# EAGLE board rc2usb_3 (EAGLE 6.3)
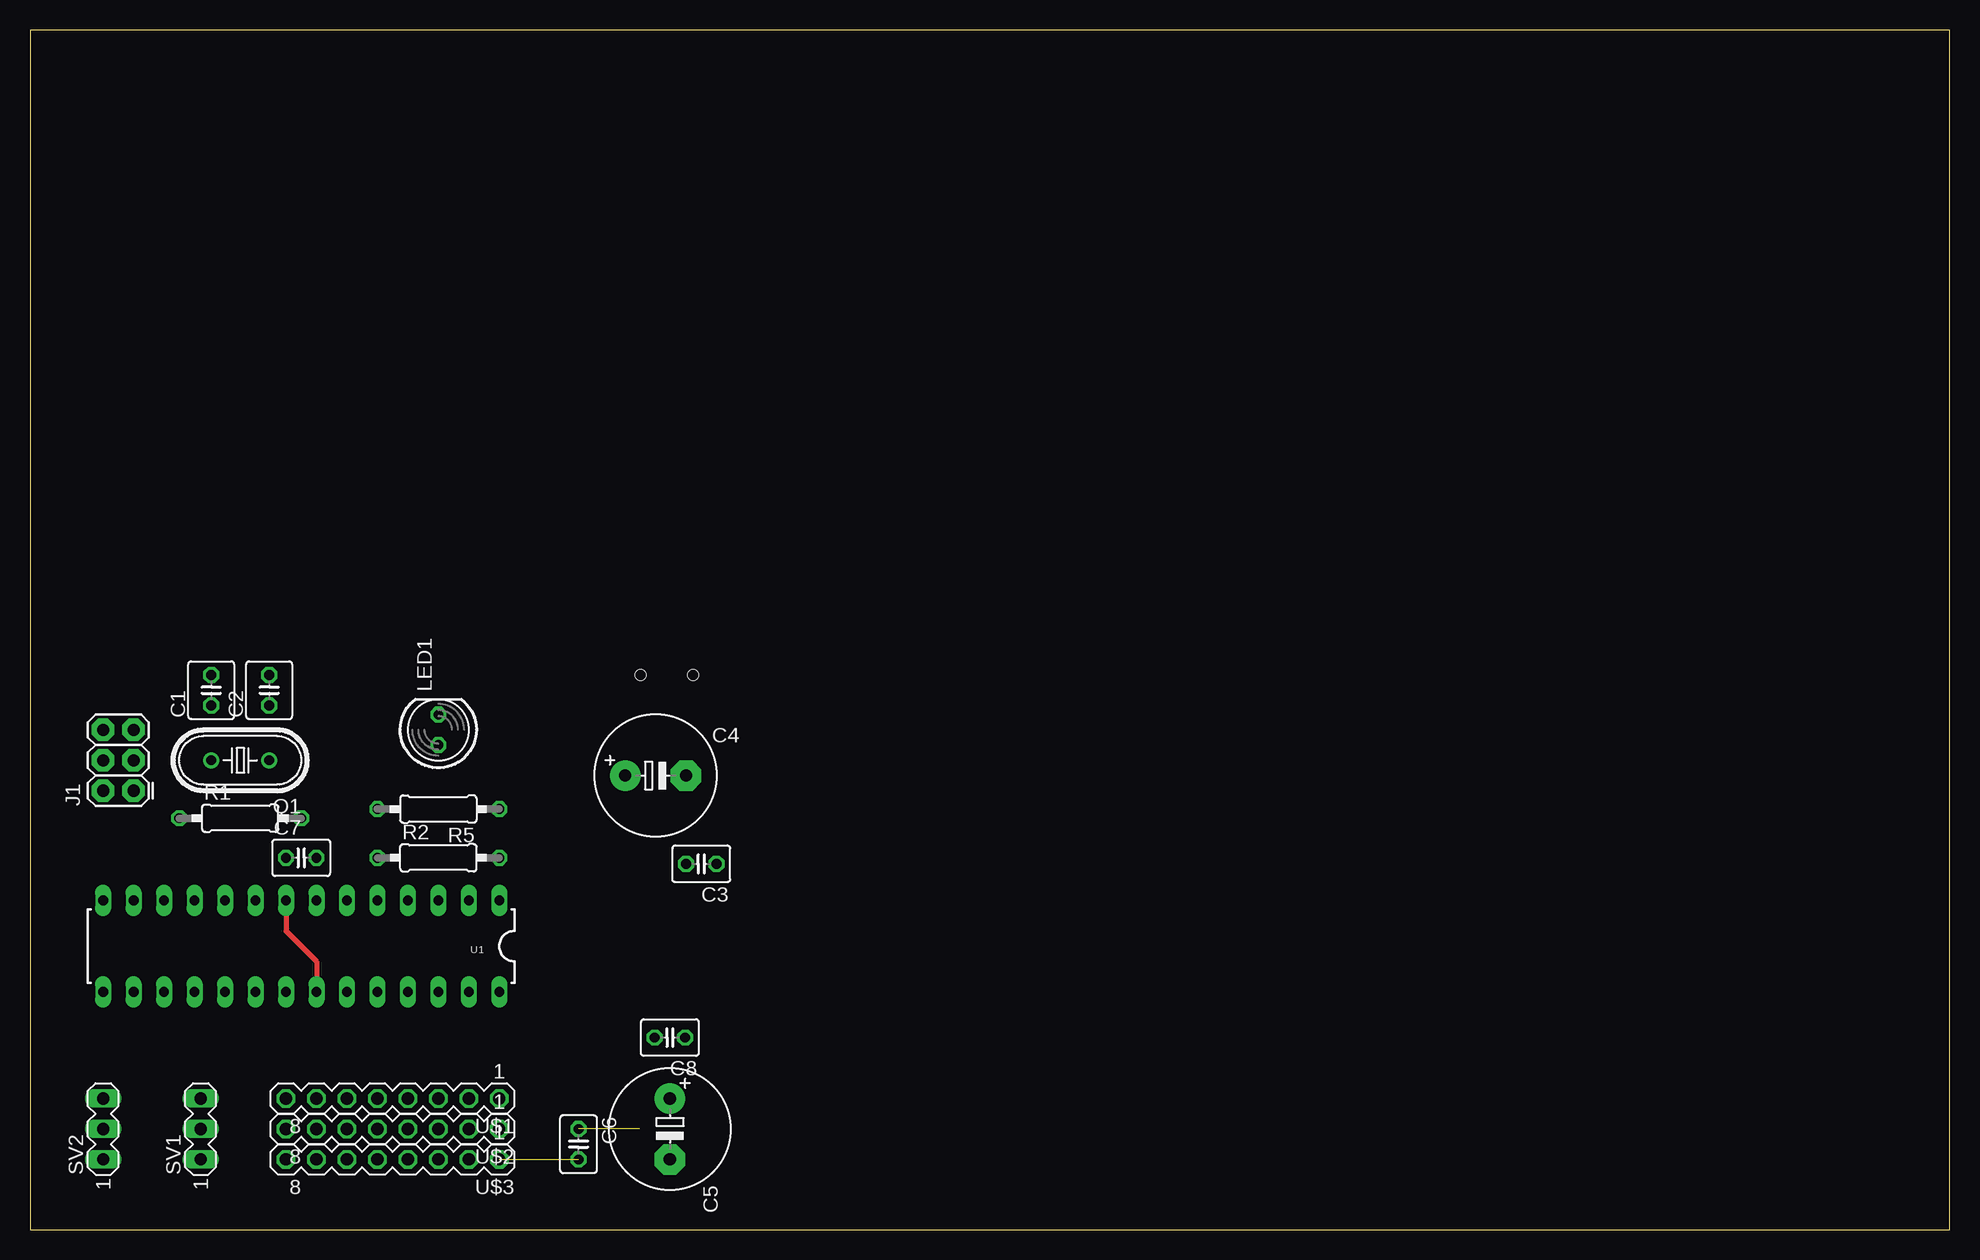
[diagram p0: board, top side]
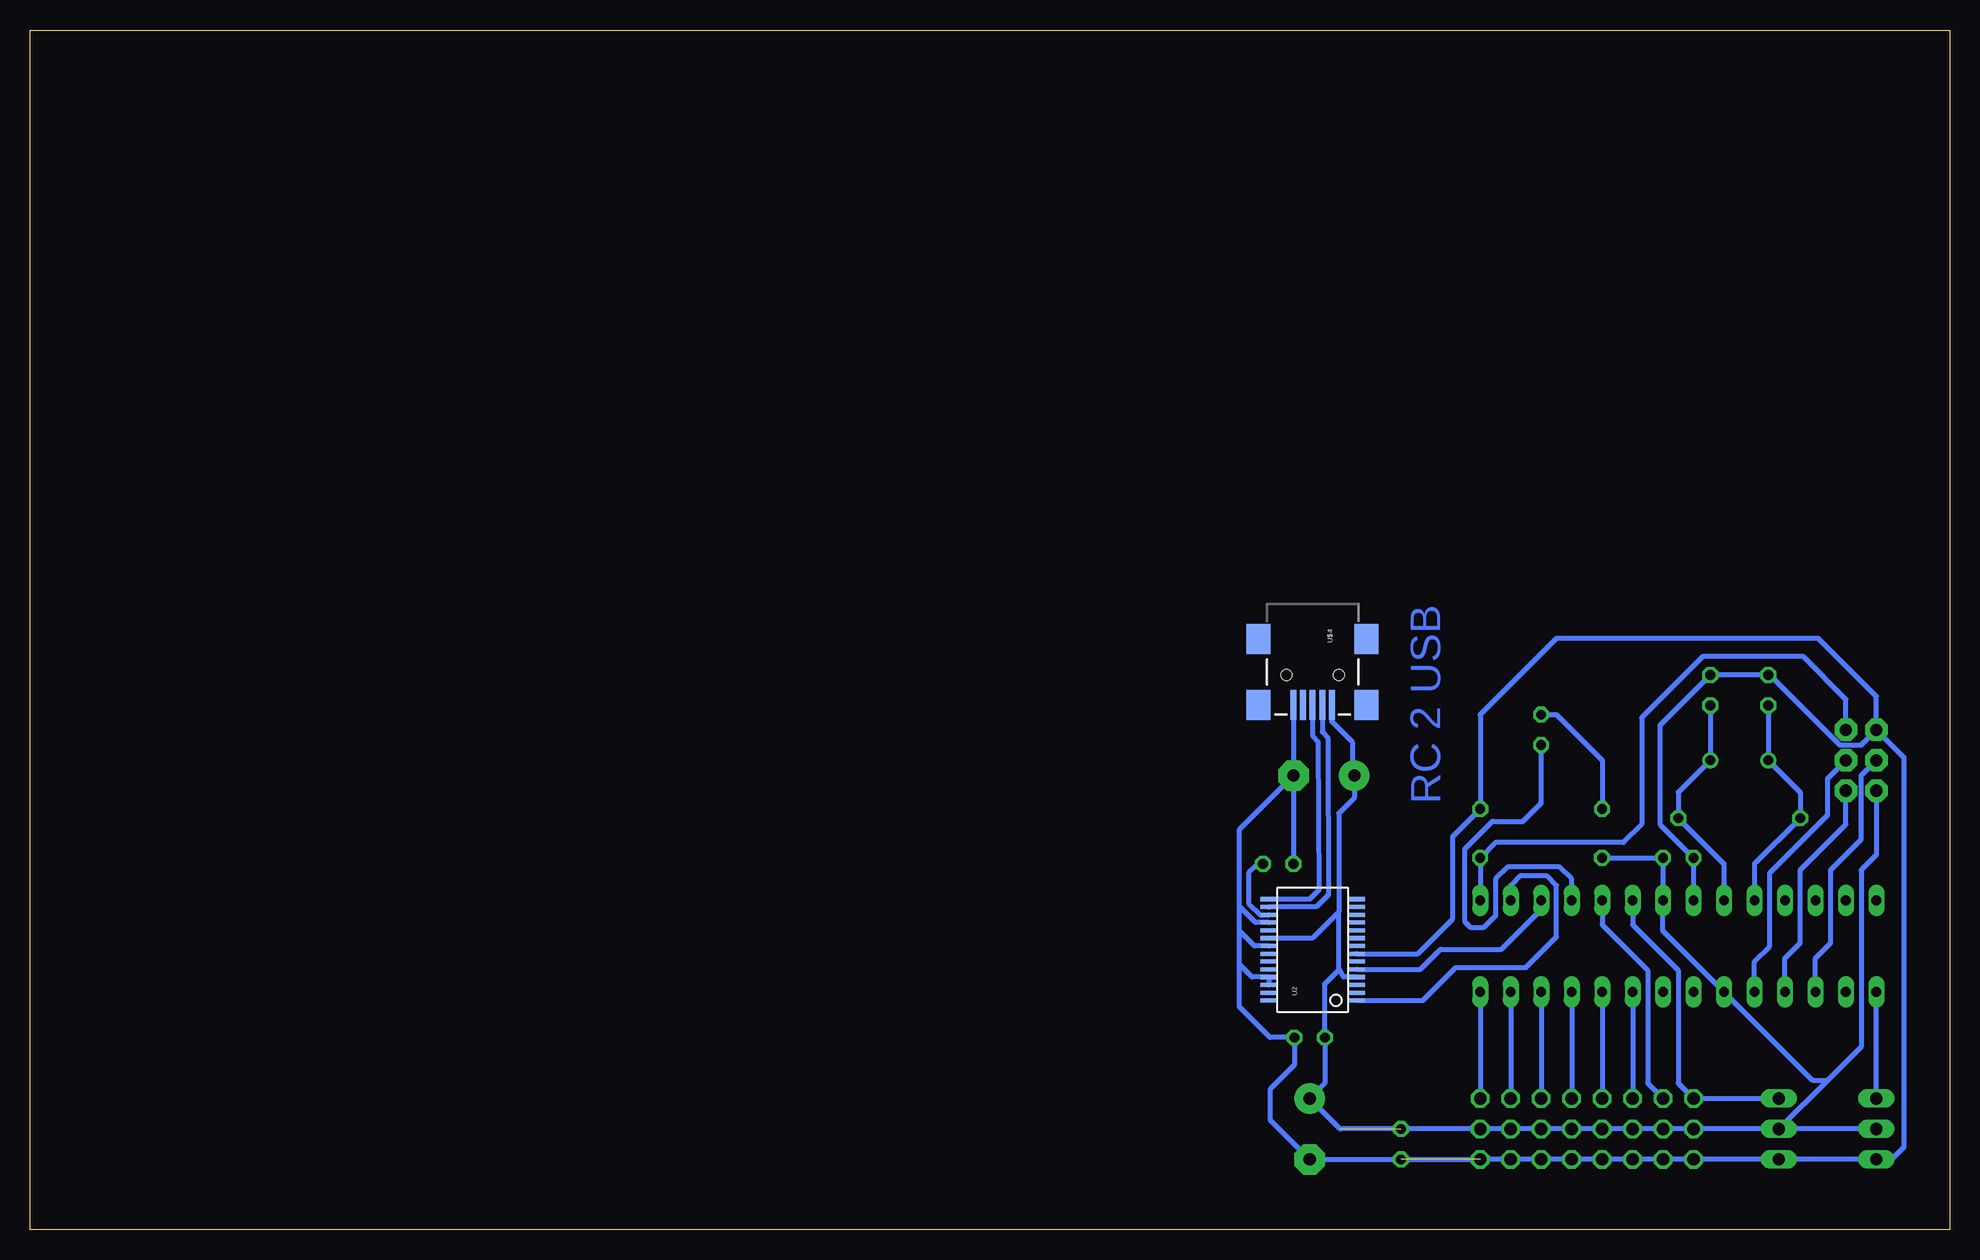
[diagram p1: board, bottom side, seen from below]

Size 160 x 100 mm. Coordinates in mm from the lower left corner, seen from the top.
Outline: 0,0 160,0 160,100 0,100 0,0
Copper layers (1*16): Top 0.035mm / dielectric 1.5mm / Bottom 0.035mm
Design rules "default": minimum track width 10mil, minimum drill 24mil, track to track 8mil, track to pad 8mil, pad to pad 8mil, via to via 8mil, smd to smd 8mil, copper to edge 40mil, drill to drill 8mil, minimum pad ring 10mil, minimum via ring 8mil, stop-mask expansion 4mil, vias tented up to drill 0mil, thermal gap 10mil

## Footprints (pad centres in the part's own frame; a part is rotated, then mirrored left to right if it is on the bottom)
C025-040X050 = drill 0.813 octagon: 1 -1.27,0; 2 1.27,0
C025-030X050 = drill 0.813 octagon: 1 -1.27,0; 2 1.27,0
E5-10,5 = drill 1.016 pad 2.54: + -2.54,0 | drill 1.016 pad 2.54 octagon: - 2.54,0
2X3 = drill 1.016 pad 1.88 octagon: 1 0,0; 2 0,2.54; 3 2.54,0; 4 2.54,2.54; 5 5.08,0; 6 5.08,2.54
LED5MM = drill 0.813 octagon: A -1.27,0; K 1.27,0
HC49U70 = drill 0.813: 1 -2.413,0; 2 2.413,0
0207/10 = drill 0.813 octagon: 1 -5.08,0; 2 5.08,0
MA03-1 = drill 1.016 long: 1 -2.54,0; 2 0,0; 3 2.54,0
DIL28-3 = drill 0.813 long: 1 -16.51,-3.81; 2 -13.97,-3.81; 3 -11.43,-3.81; 4 -8.89,-3.81; 5 -6.35,-3.81; 6 -3.81,-3.81; 7 -1.27,-3.81; 8 1.27,-3.81; 9 3.81,-3.81; 10 6.35,-3.81; 11 8.89,-3.81; 12 11.43,-3.81; 13 13.97,-3.81; 14 16.51,-3.81; 15 16.51,3.81; 16 13.97,3.81; 17 11.43,3.81; 18 8.89,3.81; 19 6.35,3.81; 20 3.81,3.81; 21 1.27,3.81; 22 -1.27,3.81; 23 -3.81,3.81; 24 -6.35,3.81; 25 -8.89,3.81; 26 -11.43,3.81; 27 -13.97,3.81; 28 -16.51,3.81
SSOP28DB = smd 0.348 x 1.397: 1 -4.225,-3.656; 2 -3.575,-3.656; 3 -2.925,-3.656; 4 -2.275,-3.656; 5 -1.625,-3.656; 6 -0.975,-3.656; 7 -0.325,-3.656; 8 0.325,-3.656; 9 0.975,-3.656; 10 1.625,-3.656; 11 2.275,-3.656; 12 2.925,-3.656; 13 3.575,-3.656; 14 4.225,-3.656; 15 4.225,3.656; 16 3.575,3.656; 17 2.925,3.656; 18 2.275,3.656; 19 1.625,3.656; 20 0.975,3.656; 21 0.325,3.656; 22 -0.325,3.656; 23 -0.975,3.656; 24 -1.625,3.656; 25 -2.275,3.656; 26 -2.925,3.656; 27 -3.575,3.656; 28 -4.225,3.656
HEADER_8_WAY = drill 1.016 octagon: 1 -8.89,0; 2 -6.35,0; 3 -3.81,0; 4 -1.27,0; 5 1.27,0; 6 3.81,0; 7 6.35,0; 8 8.89,0
USB-MINIB = smd 2.5 x 0.5: D+ 2.5,0; D- 2.5,0.8; GND 2.5,-1.6; ID 2.5,-0.8; VBUS 2.5,1.6 | smd 2.5 x 2: MTN1 -3,4.5; MTN2 2.5,4.5; MTN3 -3,-4.5; MTN4 2.5,-4.5 | hole 0.9: 0,2.2; 0,-2.2

## Placement (x,y rotation side)
C1  22p  [C025-040X050]  15.11,44.96 90 top
C2  22p  [C025-040X050]  19.94,44.96 90 top
C3  100nF  [C025-030X050]  55.96,30.48 180 top
C4  1000uF  [E5-10,5]  52.15,37.85 0 top
C5  1000uF  [E5-10,5]  53.34,8.38 270 top
C6  100nF  [C025-030X050]  45.72,7.11 270 top
C7  100nF  [C025-030X050]  22.61,30.99 0 top
C8  100nF  [C025-030X050]  53.34,16 180 top
J1  AVR_SPI_PRG_6PTH  [2X3]  8.64,36.58 90 top
LED1  [LED5MM]  34.04,41.66 90 top
Q1  16MHz  [HC49U70]  17.53,39.12 180 top
R1  1M  [0207/10]  17.53,34.29 0 top
R2  [0207/10]  34.04,30.99 0 top
R5  680  [0207/10]  34.04,35.05 180 top
SV1  [MA03-1]  14.22,8.38 90 top
SV2  [MA03-1]  6.1,8.38 90 top
U1  ATMEGA328P_PDIP  [DIL28-3]  22.61,23.62 180 top
U2  FT232RL-BASICSSOP  [SSOP28DB]  53.09,23.32 90 bottom
U$1  HEADER_8_WAY  [HEADER_8_WAY]  30.23,10.92 180 top
U$2  HEADER_8_WAY  [HEADER_8_WAY]  30.23,8.38 180 top
U$3  HEADER_8_WAY  [HEADER_8_WAY]  30.23,5.84 180 top
U$4  USB-MINIB-5PIN  [USB-MINIB]  53.09,46.23 270 bottom

## Library data of the parts
C1 C2 R1 R2 R5 = resistor
C3-C8 = rcl
J1 U$4 = SparkFun-Connectors
LED1 = led
Q1 = crystal; OC_FARNELL: unknown; OC_NEWARK: unknown
SV1 SV2 = con-lstb; OC_FARNELL: unknown; OC_NEWARK: unknown
U1 U2 = SparkFun-DigitalIC
U$1-U$3 = rc2usb

## Nets
+5V: C4.+ C5.+ C6.1 C7.2 C8.2 J1.2 R2.1 SV1.2 SV2.2 U1.7 U1.20 U2.4 U2.20 U$2.1 U$2.2 U$2.3 U$2.4 U$2.5 U$2.6 U$2.7 U$2.8 U$4.VBUS
GND: C1.2 C2.2 C3.2 C4.- C5.- C6.2 C7.1 C8.1 J1.6 R5.1 SV1.1 SV2.1 U1.8 U1.22 U2.7 U2.18 U2.21 U2.25 U2.26 U$3.1 U$3.2 U$3.3 U$3.4 U$3.5 U$3.6 U$3.7 U$3.8 U$4.GND
N$1: C2.1 Q1.1 R1.2 U1.9
N$2: C1.1 Q1.2 R1.1 U1.10
N$3: J1.4 U1.17
N$4: J1.1 U1.18
N$5: J1.3 U1.19
N$6: U2.15 U$4.D+
N$7: U2.16 U$4.D-
N$8: U1.24 U$1.5
N$9: C3.1 U2.17
N$10: LED1.A U1.4
N$14: U1.25 U$1.4
N$15: U1.26 U$1.3
N$16: U1.23 U$1.6
N$17: U1.27 U$1.2
N$18: U1.28 U$1.1
N$19: U1.5 U$1.7
N$20: SV1.3 U1.6 U$1.8
N$22: SV2.3 U1.15
N$23: LED1.K R5.2
RESET: J1.5 R2.2 U1.1
RXD: U1.2 U2.1
TXD: U1.3 U2.5

## Tracks (layer width: path | path; a pad name or v marks a point on that pad's centre or on a via)
+5V  (1 unrouted)
  Bottom 0.406: SV2.2 SV1.2 | SV1.2 U$2.8 U$2.7 U$2.6 U$2.5 U$2.4 U$2.3 U$2.2 U$2.1 50.8,8.38 C5.+ 52.07,12.19 C8.2 52.07,20.49 50.87,21.69 | J1.2 6.1,31.24 7.37,29.97 7.37,15.24 10.16,12.45 | 10.16,12.45 SV1.2 | 10.16,12.45 11.43,12.45 U1.20 23.88,24.89 U1.7 C7.2 R2.1 | U$4.VBUS 51.49,42.34 49.78,40.64 49.78,38.02 C4.+ 49.61,35.99 50.9,34.7 50.9,26.49 | 50.9,26.49 53.11,24.28 56.68,24.28 U2.20 | U2.4 50.51,21.04 50.87,21.69 | 50.87,21.69 50.9,21.74 50.9,26.49
GND  (1 unrouted)
  Top 0.406: U1.8 21.34,24.89 23.88,22.35 U1.22
  Bottom 0.406: U1.8 C7.1 24.13,33.78 24.13,42.04 C2.2 C1.2 14.99,46.23 9.14,40.39 7.37,40.39 J1.6 | U$4.GND C4.- | C4.- | C4.- C3.2 | U2.18 57.85,25.59 59.18,26.92 | 59.18,26.92 59.18,33.35 C4.- | U2.21 57.93,23.64 59.18,24.89 | 59.18,24.89 59.18,26.92 | 59.18,22.1 58.13,21.04 U2.25 U2.26 | 59.18,22.1 59.18,24.89 | 59.18,22.1 59.18,18.54 56.64,16 C8.1 54.61,13.72 56.64,11.68 56.64,9.14 C5.- U$3.1 U$3.2 U$3.3 U$3.4 U$3.5 U$3.6 U$3.7 U$3.8 SV1.1 SV2.1 4.83,5.84 3.81,6.86 3.81,39.37 J1.6 | J1.6 6.1,44.45 10.92,49.28 32.77,49.28 39.12,42.93 R5.1 41.4,32.77 41.4,25.91 44.32,22.99 U2.7
N$1
  Bottom 0.406: U1.9 18.8,30.48 R1.2 22.61,36.45 Q1.1 C2.1
N$2
  Bottom 0.406: U1.10 16.26,30.48 R1.1 12.45,36.45 Q1.2 C1.1
N$3
  Bottom 0.406: U1.17 11.18,22.61 9.91,23.88 9.91,29.97 7.37,32.51 7.37,37.85 J1.4
N$4
  Bottom 0.406: U1.18 13.72,22.61 12.45,23.88 12.45,29.97 8.64,33.78 J1.1
N$5
  Bottom 0.406: U1.19 16.26,22.35 14.99,23.62 14.99,29.72 10.16,34.54 10.16,37.59 J1.3
N$6
  Bottom 0.406: U$4.D+ 53.09,41.15 52.63,40.66 52.58,28.3 53.34,27.53 U2.15
N$7
  Bottom 0.406: U$4.D- 52.29,41.47 51.82,41 51.77,27.91 52.78,26.9 U2.16
N$8
  Bottom 0.406: U1.24 U$1.5
N$9
  Bottom 0.406: C3.1 57.66,30.48 58.42,29.72 58.42,27.2 57.45,26.24 U2.17
N$10
  Bottom 0.406: U1.4 31.5,29.21 32.51,30.23 36.83,30.23 37.85,29.21 37.85,26.16 38.86,25.15 39.88,25.15 40.39,25.65 40.39,31.75 38.1,34.04 35.56,34.04 34.04,35.56 LED1.A
N$14
  Bottom 0.406: U1.25 U$1.4
N$15
  Bottom 0.406: 34.04,20.07 U1.26 U$1.3
N$16
  Bottom 0.406: U1.23 U$1.6
N$17
  Bottom 0.406: U1.27 U$1.2
N$18
  Bottom 0.406: U1.28 U$1.1
N$19
  Bottom 0.406: U1.5 28.96,25.4 25.15,21.59 25.15,12.19 U$1.7
N$20
  Bottom 0.406: U1.6 26.42,25.4 22.61,21.59 22.61,12.19 U$1.8 SV1.3
N$22
  Bottom 0.406: SV2.3 U1.15
N$23
  Bottom 0.406: LED1.K 32.77,42.93 28.96,39.12 R5.2
RESET
  Bottom 0.406: U1.1 R2.2 37.86,32.26 27.18,32.26 25.65,33.78 25.65,42.67 20.57,47.75 12.19,47.75 8.64,44.2 J1.5
RXD
  Bottom 0.406: U2.1 43.9,19.09 41.15,21.84 35.31,21.84 32.77,24.38 32.77,28.7 33.53,29.46 35.81,29.46 36.58,28.7 U1.2
TXD
  Bottom 0.406: U2.5 44.09,21.69 42.42,23.37 37.34,23.37 34.04,26.67 U1.3

## Text on the board
Bottom: RC 2 USB